# Altium PCB PCB1.PcbDoc
Units mm, origin at the board's own origin, x right, y up, seen from the top; angles counter-clockwise.
Board outline 93.5 x 93.5 mm, 2 copper layers (Top Layer, Bottom Layer); 120 components, 82 nets, 421 pads, 34 vias.
Unrouted connection lines stored in the file: 248.
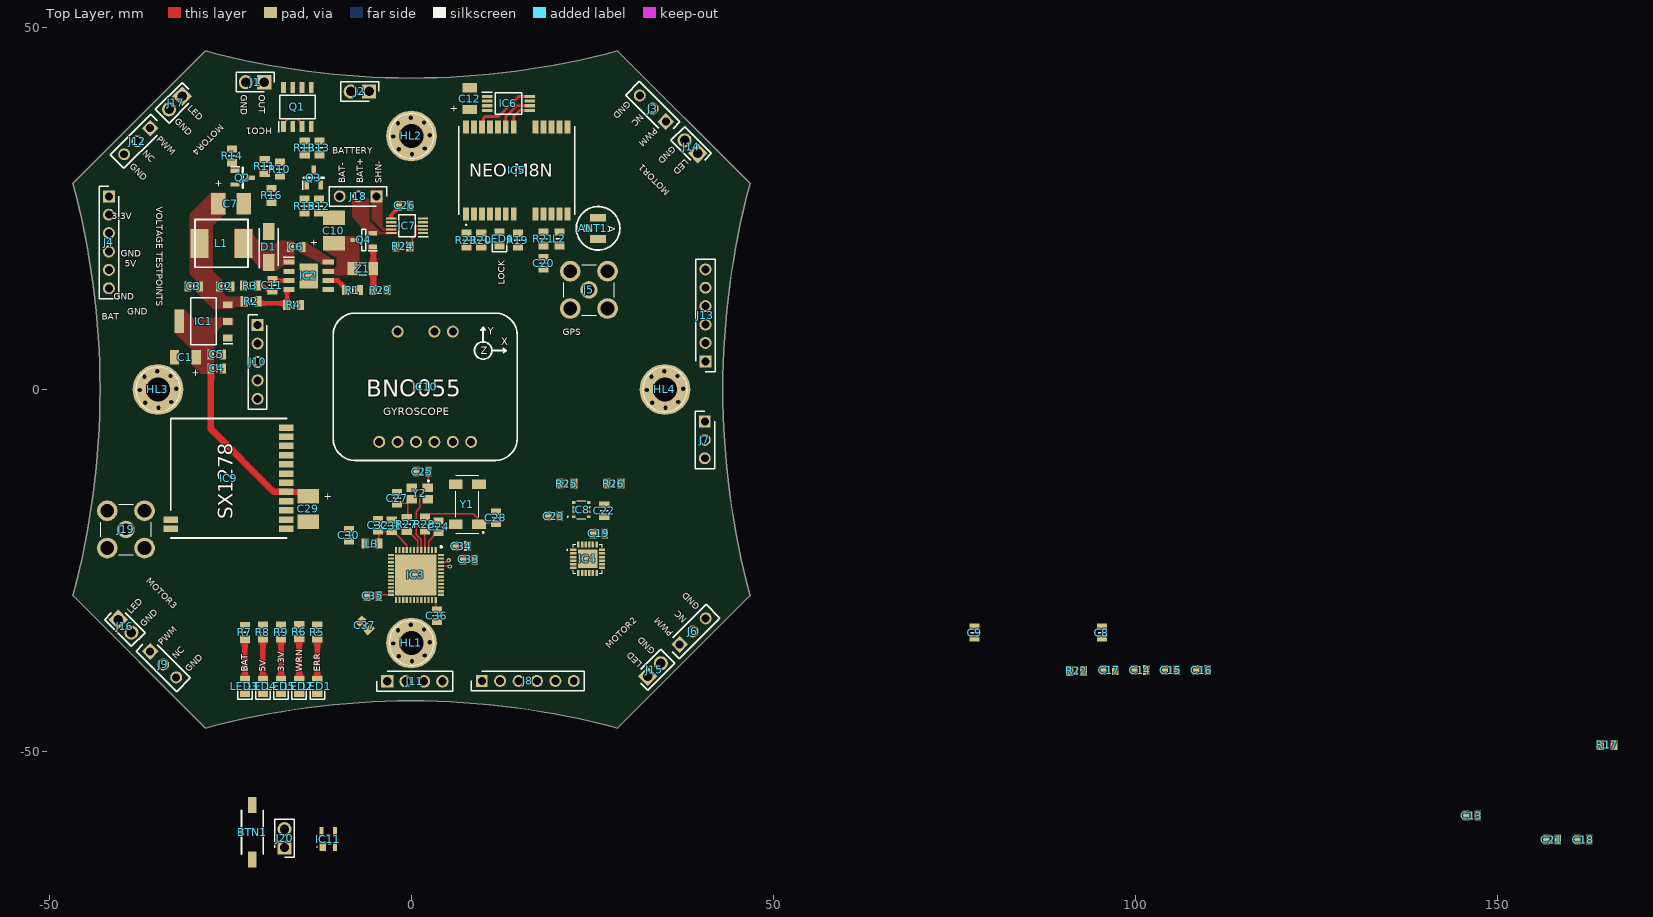
[diagram p0: Top Layer view]
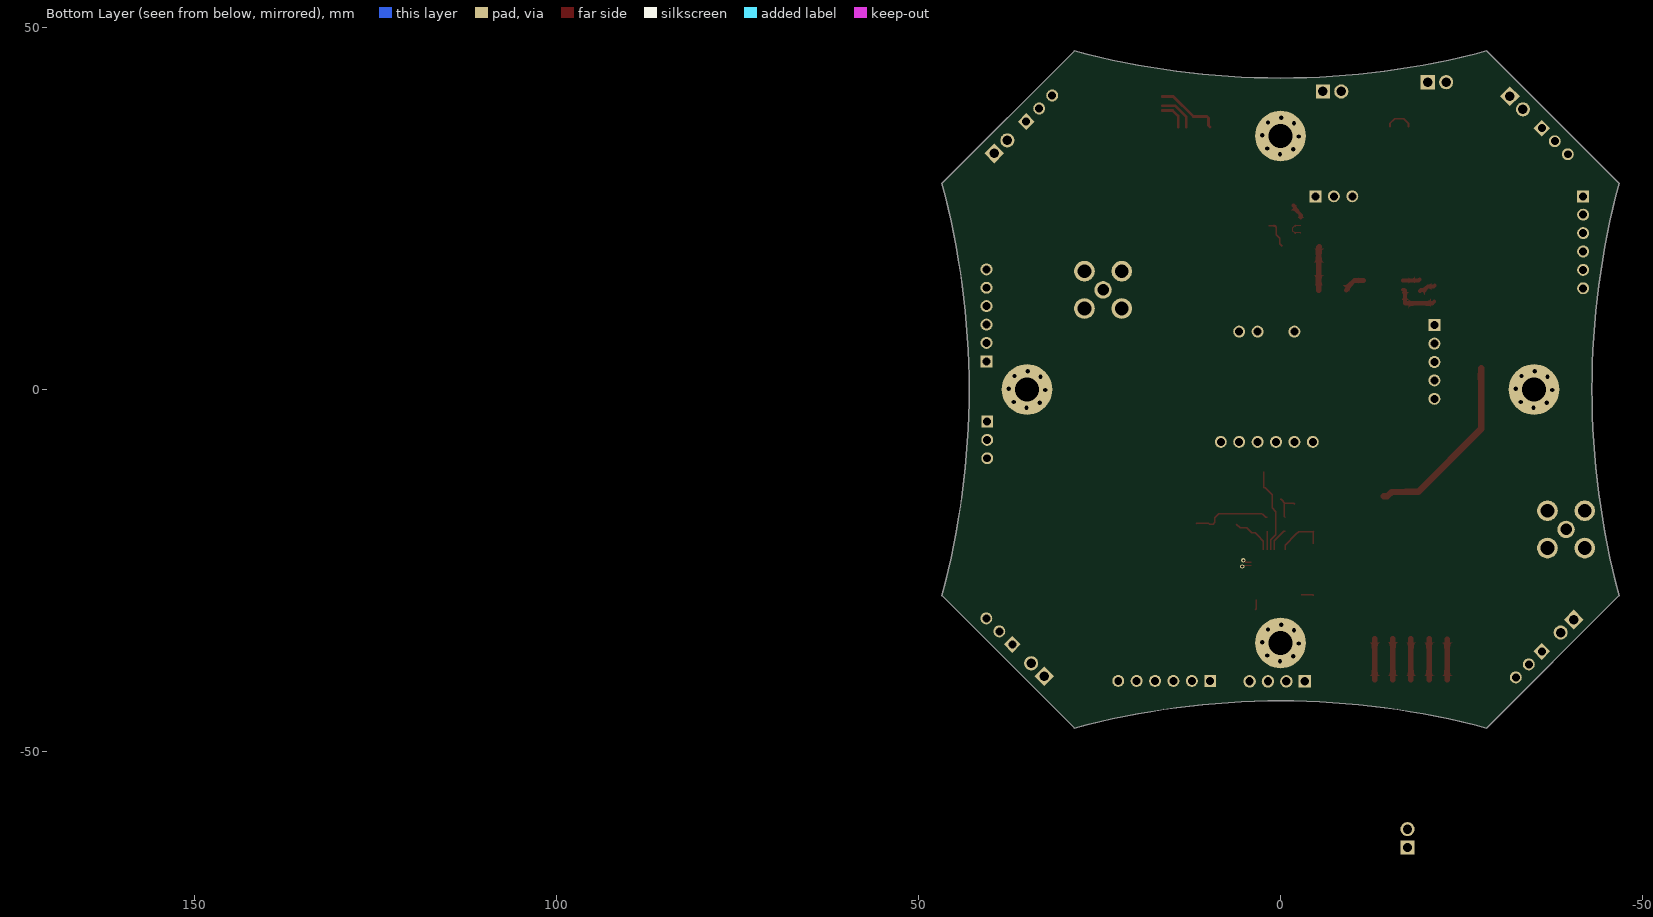
[diagram p1: Bottom Layer view, seen from below]

## Layer stack, top to bottom
Top Solder: solder mask 0.0102, Solder Resist, Dk 3.5
Top Layer: signal copper 0.0356
Dielectric 1: dielectric 0.32, FR-4, Dk 4.8
Bottom Layer: signal copper 0.0356
Bottom Solder: solder mask 0.0102, Solder Resist, Dk 3.5

## Board outline
-46.748,-28.47 ccw(c-153,0) -46.748,28.47 -28.47,46.748 ccw(c0,153) 28.47,46.748 46.748,28.47 ccw(c153,0) 46.748,-28.47 28.47,-46.748 ccw(c0,-153) -28.47,-46.748

## Design rules (kind name [scope] priority, off if disabled: settings)
BoardOutlineClearance [All] p1: gap=0.2 ignorepadtopadclearanceinfootprint=FALSE except(0.4: Arc-SplitBarrior Arc-SplitContinuation Track-SplitBarrior Track-SplitContinuation SMDPad-SplitBarrior SMDPad-SplitContinuation THPad-SplitBarrior THPad-SplitContinuation Via-SplitBarrior Via-SplitContinuation Fill-SplitBarrior Fill-SplitContinuation Poly-SplitBarrior Poly-SplitContinuation Region-SplitBarrior Region-SplitContinuation Text-SplitBarrior Text-SplitContinuation)
Clearance "Clearance Bottom Layer" [OnLayer('Bottom Layer')] p1: gap=0.203 ignorepadtopadclearanceinfootprint=TRUE except(0.253: Arc-Fill Arc-Poly Arc-Region Track-Fill Track-Poly Track-Region; 0.254: Arc-Text Track-Text SMDPad-Text THPad-Text Via-Text Fill-Text Poly-Text Region-Text Text-Text)
Clearance "Clearance Top Layer" [OnLayer('Top Layer')] p2: gap=0.203 ignorepadtopadclearanceinfootprint=TRUE except(0.253: Arc-Fill Arc-Poly Arc-Region Track-Fill Track-Poly Track-Region; 0.254: Arc-Text Track-Text SMDPad-Text THPad-Text Via-Text Fill-Text Poly-Text Region-Text Text-Text)
Clearance [All] p3: gap=0.2 ignorepadtopadclearanceinfootprint=TRUE except(0.089: Arc-SMDPad Track-SMDPad; 0.127: Arc-Arc Arc-Track Track-Track SMDPad-SMDPad SMDPad-Via THPad-Via; 0.254: Arc-Via Arc-Text Track-Via Track-Text SMDPad-Text THPad-Text Via-Via Via-Text Fill-Text Poly-Text Region-Text Text-Text; 0.5: THPad-THPad)
Height [All] p1: minheight=0 maxheight=100 prefheight=12.7
HoleSize ViaSize [IsVia] p1: absolutevalues=TRUE maxlimit=2.54 minlimit=0.3 maxpercent=80.000 minpercent=20.000
HoleSize [All] p2: absolutevalues=TRUE maxlimit=6.3 minlimit=0.2 maxpercent=80.000 minpercent=20.000
MinimumAnnularRing [All] p1: minimumring=0.13
MinimumSolderMaskSliver [All] p1: minsoldermaskwidth=0.1
PolygonConnect PolygonConnect_1 [All] p1: connectstyle=Direct reliefconductorwidth=0.508 reliefentries=4 polygonreliefangle="90 Angle" airgapwidth=0.254
RoutingCorners [All] p1: cornerstyle=Round minsetback=2.54 maxsetback=2.54
RoutingVias [All] p1: holewidth=0.5 width=1 viastyle="Through Hole" minholewidth=0.3 minwidth=0.6 maxholewidth=1 maxwidth=2
SilkToSilkClearance [All] p1: silktosilkclearance=0.1
SilkToSolderMaskClearance [IsPad] p1: minsilkscreentomaskgap=0.1 clearancetoexposedcopper=TRUE
SolderMaskExpansion [All] p1: expansion=0.102 istentingtop=FALSE
Width [All] p1: maxlimit=2.54 minlimit=0.127 preferedwidth=0.381
24 further rules are at their usual default settings.

## Classes and differential pairs
component class Schematic: BTN1 C1 C2 C3 C4 C5 C6 C7 C8 C9 C10 C11 C12 C13 C14 C15 C16 C17 C18 C19 C20 C21 C22 C23 C24 C25 C26 C27 C28 C29 C30 C31 C32 C33 C34 C35 C36 C37 D1 HL1 HL2 HL3 HL4 IC1 IC2 IC3 IC4 IC5 IC6 IC7 IC8 IC9 IC10 IC11 J1 J2 J3 J4 J8 J13 J16 J19 J20 L1 L2 L3 LED1 LED2 LED3 LED4 LED5 LED6 Q1 Q2 Q3 Q4 R1 R2 R3 R4 R5 R6 R7 R8 R9 R10 R11 R12 R13 R14 R15 R16 R17 R18 R19 R20 R21 R22 R23 R24 R25 R26 R27 R28 R29 Y1 Y2 Z1

## Components (designator, comment, footprint, x,y, rotation, side; value= is the part's Value field where it differs from the comment)
ANT1 "U.FL / IPX" "U.FL IPX Connector" 25.775,22.25 r270 top
BTN1 "BTN" SMD-Button-3*6mm -21.971,-64.135 r90 top
C1 "T A 47u" Tantal-A-1206 -29.718,4.445 r270 top
C2 "10n" "CAPC2012 METRIC" -25.712,14.224 r0 top
C3 "10u" "CAPC2012 METRIC" -30.03,14.224 r180 top
C4 "10n" "CAPC2012 METRIC" -26.866,2.921 r0 top
C5 "100n" "CAPC2012 METRIC" -26.866,4.826 r0 top
C6 "100n" "CAPC2012 METRIC" -15.882,19.678 r180 top
C7 "T B 47u" Tantal-B-1210 -26.67,25.654 r90 top
C8 "10u" "CAPC2012 METRIC" 95.344,-33.561 r90 top
C9 "10u" "CAPC2012 METRIC" 77.744,-33.561 r90 top
C10 "T B 47u" Tantal-B-1210 -10.702,20.178 r180 top
C11 "150p" "CAPC2012 METRIC" -19.202,14.358 r270 top
C12 "T A 47u" Tantal-A-1206 8.038,38.653 r180 top
C13 "100n" "CAPC2012 METRIC" 146.43,-58.849 r0 top
C14 "10u" "CAPC2012 METRIC" 100.644,-38.761 r0 top
C15 "100n" "CAPC2012 METRIC" 104.844,-38.761 r0 top
C16 "10n" "CAPC2012 METRIC" 109.144,-38.761 r0 top
C17 "100n" "CAPC2012 METRIC" 96.344,-38.761 r0 top
C18 "100n" "CAPC2012 METRIC" 161.797,-62.151 r0 top
C19 "2.2nF" "CAPC2012 METRIC" 25.882,-19.888 r0 top
C20 "10n" "CAPC2012 METRIC" 18.25,17.43 r270 top
C21 "2.2u" "CAPC2012 METRIC" 157.479,-62.151 r0 top
C22 "100n" "CAPC2012 METRIC" 26.621,-16.756 r90 top
C23 "100n" "CAPC2012 METRIC" 19.68,-17.5 r180 top
C24 "20p" "CAPC2012 METRIC" 3.747,-18.982 r90 top
C25 "20p" "CAPC2012 METRIC" 1.508,-11.349 r180 top
C26 "100n" "CAPC2012 METRIC" -0.958,25.4 r180 top
C27 "20p" "CAPC2012 METRIC" -1.982,-15.048 r270 top
C28 "20p" "CAPC2012 METRIC" 11.65,-17.731 r270 top
C29 "B" Tantal-B-1210 -14.25,-14.75 r0 top
C30 "10nF" "CAPC2012 METRIC" -8.636,-20.124 r90 top
C31 "10n" "CAPC2012 METRIC" -2.719,-18.844 r270 top
C32 "1u" "CAPC2012 METRIC" -4.605,-18.754 r270 top
C33 "100n" "CAPC2012 METRIC" 7.932,-23.454 r180 top
C34 "100n" "CAPC2012 METRIC" 6.902,-21.64 r180 top
C35 "100n" "CAPC2012 METRIC" -5.32,-28.5 r0 top
C36 "100n" "CAPC2012 METRIC" 3.5,-31.25 r90 top
C37 "10u" "CAPC2012 METRIC" -6.42,-32.58 r135 top
D1 "1N5824" DIOM5226X240N -19.702,19.678 r90 top
HL1 "M3" "DRILL HOLE M3" 0,-35 r0 top locked
HL2 "M3" "DRILL HOLE M3" 0,35 r0 top locked
HL3 "M3" "DRILL HOLE M3" -35,0 r0 top locked
HL4 "M3" "DRILL HOLE M3" 35,0 r0 top locked
IC1 "AMS1117-3.3" SOT229P700X180-4N -28.702,9.398 r180 top
IC2 "MP1584EN-LF" SOIC127P600X170-9N -14.202,15.678 r0 top
IC3 "STM32F401CCU6" QFN50P700X700X60-49N-D 0.607,-25.607 r270 top
IC4 "MPU-6050" MPU6050 24.312,-23.388 r0 top
IC5 "NEO-M8N" NEO-M8T 14.534,30.24 r270 top
IC6 "M24C32-RDW6TP" SOP65P640X120-8N 13.389,39.486 r0 top
IC7 "INA226AIDGST" SOP50P490X110-10N -0.594,22.59 r180 top
IC8 "BME280" MODBME280 23.446,-16.586 r180 top
IC9 "SX1278" SX1278 -25.25,-12.25 r180 top
IC10 "Adafruit BNO055" "Adfruit BNO055" 1.9,0.37 r0 top
IC11 "MAX811TEUS+" MAX811REUST -11.486,-62.087 r0 top
J1 "HCO1" HDRV2W110P0X254_1X2_508X254X854P -20.32,42.418 r180 top
J2 "HCO2" HDRV2W110P0X254_1X2_508X254X854P -5.842,41.148 r180 top
J3 "M1" HDRV3W64P0X254_1X3_762X254X869P 35.12,36.994 r135 top
J4 "Voltages" HDRV6W64P0X254_1X6_1524X254X869P -41.783,26.67 r270 top
J5 "SMA" PCBRPSMAFRAHT 24.5,13.75 r0 top
J6 "M2" HDRV3W64P0X254_1X3_762X254X869P 37.038,-35.203 r45 top
J7 "I2C" HDRV3W64P0X254_1X3_762X254X869P 40.5,-4.42 r270 top
J8 "UART" HDRV6W64P0X254_1X6_1524X254X869P 9.71,-40.25 r0 top
J9 "M3" HDRV3W64P0X254_1X3_762X254X869P -36.071,-36.171 r315 top
J10 "SPI" HDRV5W64P0X254_1X5_1270X254X854P -21.25,8.87 r270 top
J11 "Prog" HDRV4W95P0X254_1X4_1016X254X854P -3.34,-40.3 r0 top
J12 "M4" HDRV3W64P0X254_1X3_762X254X869P -36.068,36.068 r225 top
J13 "TOF Sensor" HDRV6W64P0X254_1X6_1524X254X869P 40.6,3.88 r90 top
J14 "exLED1" HDRV2W110P0X254_1X2_508X254X854P 39.52,32.594 r135 top
J15 "exLED2" HDRV2W110P0X254_1X2_508X254X854P 32.637,-39.604 r45 top
J16 "exLED3" HDRV2W110P0X254_1X2_508X254X854P -40.471,-31.77 r315 top
J17 "exLED4" HDRV2W110P0X254_1X2_508X254X854P -31.668,40.468 r225 top
J18 "BAT IN" HDRV3W64P0X254_1X3_762X254X869P -4.826,26.67 r180 top
J19 "SMA Ant" PCBRPSMAFRAHT -39.425,-19.325 r0 top
J20 "RST JMP" HDRV2W110P0X254_1X2_508X254X854P -17.526,-63.246 r90 top
L1 "15uH" "0630 Inductor" -26.227,20.178 r180 top
L2 "27n" RESC2012X65N 20.419,20.802 r90 top
L3 "39n" RESC2012X65N -5.465,-21.281 r180 top
LED1 "S1" "0805 LED" -13,-41 r270 top
LED2 "S2" "0805 LED" -15.5,-41 r270 top
LED3 "BAT" "0805 LED" -23,-41 r270 top
LED4 "5V" "0805 LED" -20.5,-41 r270 top
LED5 "3V3" "0805 LED" -18,-41 r270 top
LED6 "PLS" "0805 LED" 12.172,20.804 r270 top
Q1 "APM4953" SOIC127P600X175-8N -15.75,39 r90 top
Q2 "BC846BLT1G" SOT96P237X111-3N -23.3,29.25 r0 top
Q3 "BC846BLT1G" SOT96P237X111-3N -13.5,29.25 r90 top
Q4 "AO3401A" SOT95P280X125-3N -6.584,20.64 r180 top
R1 "100k" RESC2012X65N -8.128,13.716 r0 top
R2 "210k" RESC2012X65N -22.152,12.178 r0 top
R3 "100k" RESC2012X65N -22.225,14.351 r180 top
R4 "40k" RESC2012X65N -16.252,11.678 r0 top
R5 "TBT" RESC2012X65N -13,-33.5 r270 top
R6 "TBT" RESC2012X65N -15.5,-33.45 r270 top
R7 "TBT" RESC2012X65N -23,-33.55 r270 top
R8 "TBT" RESC2012X65N -20.5,-33.5 r270 top
R9 "TBT" RESC2012X65N -18,-33.5 r270 top
R10 "10k" RESC2012X65N -18.161,30.414 r270 top
R11 "1k" RESC2012X65N -20.25,30.8 r270 top
R12 "10k" RESC2012X65N -12.75,25.3 r90 top
R13 "1k" RESC2012X65N -12.7,33.34 r90 top
R14 "10k" RESC2012X65N -24.765,32.258 r270 top
R15 "10k" RESC2012X65N -14.75,25.3 r90 top
R16 "100k" RESC2012X65N -19.304,26.797 r90 top
R17 "10k" RESC2012X65N 165.099,-49.07 r0 top
R18 "100k" RESC2012X65N -14.732,33.34 r90 top
R19 "10k" RESC2012X65N 14.712,20.616 r270 top
R20 "1k" RESC2012X65N 9.632,20.616 r270 top
R21 "10" RESC2012X65N 18.25,20.8 r90 top
R22 "10k" RESC2012X65N 91.844,-38.861 r0 top
R23 "DNP" RESC2012X65N 7.6,20.616 r270 top
R24 "4.7k" RESC2012X65N -1.2,19.75 r0 top
R25 "4.7k" RESC2012X65N 21.45,-13 r180 top
R26 "4.7k" RESC2012X65N 27.95,-13 r0 top
R27 "39" RESC2012X65N -0.653,-18.624 r270 top
R28 "39" RESC2012X65N 1.861,-18.605 r270 top
R29 "100k" RESC2012X65N -4.318,13.716 r0 top
Y1 "MC-306 32.7680KHz" MC306327680KA3ROHS 7.716,-15.839 r90 top
Y2 "3225 25MHz" TSX3225240000MF20GAC0 1.143,-14.366 r180 top
Z1 "BZT52C47 10V" BZT52C47 -6.702,16.678 r0 top

## Footprints (in the part's own frame and the unit in brackets; to place one, negate y for a bottom-side part, rotate by r counter-clockwise, add the part's x,y. Pads: shape width x height; smd on the part's side, far side on the other; paste and mask are expansions set on the pad)
"0630 Inductor" [mm]
  rect 2.5x4 smd: 1(-3.025,0) 2(3.025,0)
  silkscreen extent -3.65,-3.3 3.65,3.3
"0805 LED" [mm]
  rect 1x1.4 smd: 1(-0.95,0) 2(0.95,0)
  silkscreen extent 0.4,-1 1.78,1
"Adfruit BNO055" [mm]
  round 1.65 hole 1.1: 1(-3.81,7.62) 3(1.27,7.62) 4(3.81,7.62) 5(-6.35,-7.62) 6(-3.81,-7.62) 7(-1.27,-7.62) 8(1.27,-7.62) 9(3.81,-7.62) 10(6.35,-7.62)
  silkscreen extent -12.7,-10.16 12.7,10.16
BZT52C47 [mm]
  rect 1.34x1.8 smd: 1(-1.43,0) 2(1.43,0)
  silkscreen extent -0.5,-0.85 0.5,0.85
"CAPC2012 METRIC" [mm]
  rect 0.91x1.39 smd: 1(-0.82,0) 2(0.82,0)
  silkscreen extent 0,-0.53 0,0.53, body extent -1,-0.63 1,0.63, height 0.95
DIOM5226X240N [mm]
  rect 2.35x1.55 smd: 1(-2.15,0) 2(2.15,0)
  silkscreen extent -2.92,-1.3 2.6,1.3, body extent -2.6,-1.3 2.6,1.3, height 2.4
"DRILL HOLE M3" [mm]
  round 7 hole 3.3 mask+0: 1(0,0)
  silkscreen extent -3.08,-3.08 3.07,3.08
HDRV2W110P0X254_1X2_508X254X854P [mm]
  rect 1.95x1.95 hole 1.3: 1(0,0)
  round 1.95 hole 1.3: 2(2.54,0)
  silkscreen extent -1.35,-1.35 3.89,1.35, body extent -1.27,-1.27 3.81,1.27, height 8.54
HDRV3W64P0X254_1X3_762X254X869P [mm]
  rect 1.65x1.65 hole 1.1: 1(0,0)
  round 1.65 hole 1.1: 2(2.54,0) 3(5.08,0)
  silkscreen extent -1.42,-1.35 6.5,1.35, body extent -1.27,-1.27 6.35,1.27, height 8.69
HDRV4W95P0X254_1X4_1016X254X854P [mm]
  rect 1.725x1.725 hole 1.15: 1(0,0)
  round 1.725 hole 1.15: 2(2.54,0) 3(5.08,0) 4(7.62,0)
  silkscreen extent -1.42,-1.37 9.04,1.37, body extent -1.27,-1.27 8.89,1.27, height 8.54
HDRV5W64P0X254_1X5_1270X254X854P [mm]
  rect 1.65x1.65 hole 1.1: 1(0,0)
  round 1.65 hole 1.1: 2(2.54,0) 3(5.08,0) 4(7.62,0) 5(10.16,0)
  silkscreen extent -1.42,-1.27 11.58,1.27, body extent -1.27,-1.27 11.43,1.27, height 8.54
HDRV6W64P0X254_1X6_1524X254X869P [mm]
  rect 1.65x1.65 hole 1.1: 1(0,0)
  round 1.65 hole 1.1: 2(2.54,0) 3(5.08,0) 4(7.62,0) 5(10.16,0) 6(12.7,0)
  silkscreen extent -1.42,-1.35 14.12,1.35, body extent -1.27,-1.27 13.97,1.27, height 8.69
MAX811REUST [mm]
  rect 0.94x1.31 smd: 1(-0.765,-1)
  rect 0.55x1.31 smd: 2(0.96,-1) 3(0.96,1) 4(-0.96,1)
  silkscreen extent -1.6,-1.15 0.4,0.65
MC306327680KA3ROHS [mm]
  rect 1.3x1.9 smd: 1(-2.75,-1.6) 2(2.75,-1.6) 3(2.75,1.6) 4(-2.75,1.6)
  silkscreen extent -4,-2.3 4,1.6, body extent -4,-2.42 4,2.42, height 2.64
MODBME280 [mm]
  rect 0.5x0.35 smd: 1(1.025,0.975) 2(1.025,0.325) 3(1.025,-0.325) 4(1.025,-0.975) 5(-1.025,-0.975) 6(-1.025,-0.325) 7(-1.025,0.325) 8(-1.025,0.975)
  silkscreen extent -0.6,-1.25 1.9,1.25, body extent -1.25,-1.25 1.25,1.25, height 1.1
MPU6050 [mm]
  rect 0.85x0.35 smd: 1(-1.975,1.25) 2(-1.975,0.75) 3(-1.975,0.25) 4(-1.975,-0.25) 5(-1.975,-0.75) 6(-1.975,-1.25) 13(1.975,-1.25) 14(1.975,-0.75) 15(1.975,-0.25) 16(1.975,0.25) 17(1.975,0.75) 18(1.975,1.25)
  rect 0.35x0.85 smd: 7(-1.25,-1.975) 8(-0.75,-1.975) 9(-0.25,-1.975) 10(0.25,-1.975) 11(0.75,-1.975) 12(1.25,-1.975) 19(1.25,1.975) 20(0.75,1.975) 21(0.25,1.975) 22(-0.25,1.975) 23(-0.75,1.975) 24(-1.25,1.975)
  rect 2.7x2.6 smd: 25(0,0)
  silkscreen extent -2.85,-2 2,2, body extent -2,-2 2,2, height 3.1
NEO-M8T [mm]
  rect 1.8x0.8 smd: 1(6,-7) 2(6,-5.9) 3(6,-4.8) 4(6,-3.7) 5(6,-2.6) 6(6,-1.5) 7(6,-0.4) 8(6,2.6) 9(6,3.7) 10(6,4.8) 11(6,5.9) 12(6,7) 13(-6,7) 14(-6,5.9) 15(-6,4.8) 16(-6,3.7) 17(-6,2.6) 18(-6,-0.4) 19(-6,-1.5) 20(-6,-2.6) 21(-6,-3.7) 22(-6,-4.8) 23(-6,-5.9) 24(-6,-7)
  silkscreen extent -6.1,-8 7.58,8
PCBRPSMAFRAHT [mm]
  round 2.4 hole 1.6: 1(0,0)
  round 2.85 hole 1.9: 2(-2.575,2.575) 3(-2.575,-2.575) 4(2.575,-2.575) 5(2.575,2.575)
  silkscreen extent -3.5,-3.5 3.5,3.5
QFN50P700X700X60-49N-D [mm]
  rect 0.85x0.3 smd: 1(-3.45,2.75) 2(-3.45,2.25) 3(-3.45,1.75) 4(-3.45,1.25) 5(-3.45,0.75) 6(-3.45,0.25) 7(-3.45,-0.25) 8(-3.45,-0.75) 9(-3.45,-1.25) 10(-3.45,-1.75) 11(-3.45,-2.25) 12(-3.45,-2.75) 25(3.45,-2.75) 26(3.45,-2.25) 27(3.45,-1.75) 28(3.45,-1.25) 29(3.45,-0.75) 30(3.45,-0.25) 31(3.45,0.25) 32(3.45,0.75) 33(3.45,1.25) 34(3.45,1.75) 35(3.45,2.25) 36(3.45,2.75)
  rect 0.3x0.85 smd: 13(-2.75,-3.45) 14(-2.25,-3.45) 15(-1.75,-3.45) 16(-1.25,-3.45) 17(-0.75,-3.45) 18(-0.25,-3.45) 19(0.25,-3.45) 20(0.75,-3.45) 21(1.25,-3.45) 22(1.75,-3.45) 23(2.25,-3.45) 24(2.75,-3.45) 37(2.75,3.45) 38(2.25,3.45) 39(1.75,3.45) 40(1.25,3.45) 41(0.75,3.45) 42(0.25,3.45) 43(-0.25,3.45) 44(-0.75,3.45) 45(-1.25,3.45) 46(-1.75,3.45) 47(-2.25,3.45) 48(-2.75,3.45)
  rect 5.7x5.7 smd: 49(0,0)
  silkscreen extent -4,3.38 -3.75,3.63, body extent -3.55,-3.55 3.55,3.55, height 0.6
RESC2012X65N [mm]
  rect 1x1.4 smd: 1(-0.95,0) 2(0.95,0)
  silkscreen extent 0,-0.53 0,0.53, body extent -1,-0.63 1,0.63, height 0.65
SMD-Button-3*6mm [mm]
  rect 2.2x1.2 smd: 1(-0.75,0) 2(6.75,0)
  silkscreen extent 0,-1.5 6,1.5
SOIC127P600X170-9N [mm]
  rect 1.525x0.7 smd: 1(-2.712,1.905) 2(-2.712,0.635) 3(-2.712,-0.635) 4(-2.712,-1.905) 5(2.712,-1.905) 6(2.712,-0.635) 7(2.712,0.635) 8(2.712,1.905)
  rect 2.56x3.45 smd: 9(0,0)
  silkscreen extent -3.47,2.61 -1.95,2.61, body extent -3,-2.45 3,2.45, height 1.7
SOIC127P600X175-8N [mm]
  rect 1.525x0.65 smd: 1(-2.712,1.905) 2(-2.712,0.635) 3(-2.712,-0.635) 4(-2.712,-1.905) 5(2.712,-1.905) 6(2.712,-0.635) 7(2.712,0.635) 8(2.712,1.905)
  silkscreen extent -3.47,-2.45 1.6,2.58, body extent -3,-2.45 3,2.45, height 1.75
SOP50P490X110-10N [mm]
  rect 1.4x0.3 smd: 1(-2.2,1) 2(-2.2,0.5) 3(-2.2,0) 4(-2.2,-0.5) 5(-2.2,-1) 6(2.2,-1) 7(2.2,-0.5) 8(2.2,0) 9(2.2,0.5) 10(2.2,1)
  silkscreen extent -2.9,-1.5 1.15,1.5, body extent -2.45,-1.5 2.45,1.5, height 1.1
SOP65P640X120-8N [mm]
  rect 1.475x0.45 smd: 1(-2.938,0.975) 2(-2.938,0.325) 3(-2.938,-0.325) 4(-2.938,-0.975) 5(2.938,-0.975) 6(2.938,-0.325) 7(2.938,0.325) 8(2.938,0.975)
  silkscreen extent -3.67,-1.5 1.85,1.55, body extent -3.2,-1.5 3.2,1.5, height 1.2
SOT95P280X125-3N [mm]
  rect 1.2x0.6 smd: 1(-1.25,0.95) 2(-1.25,-0.95) 3(1.25,0)
  silkscreen extent -1.85,-1.48 0.3,1.5, body extent -1.4,-1.47 1.4,1.48, height 1.25
SOT96P237X111-3N [mm]
  rect 1.25x0.6 smd: 1(-1.05,0.955) 2(-1.05,-0.955) 3(1.05,0)
  silkscreen extent -1.68,-1.46 0.08,1.51, body extent -1.18,-1.46 1.18,1.46, height 1.11
SOT229P700X180-4N [mm]
  rect 1.3x0.95 smd: 1(-3.35,2.29) 2(-3.35,0) 3(-3.35,-2.29)
  rect 1.3x3.25 smd: 4(3.35,0)
  silkscreen extent -4,-3.25 1.75,3.25, body extent -3.5,-3.25 3.5,3.25, height 1.8
SX1278 [mm]
  rect 2x0.9 smd paste+0: 1(-7.988,6.985) 2(-7.988,5.715) 3(-7.988,4.445) 4(-7.988,3.175) 5(-7.988,1.905) 6(-7.988,0.635) 7(-7.988,-0.635) 8(-7.988,-1.905) 9(-7.988,-3.175) 10(-7.988,-4.445) 11(-7.988,-5.715) 12(-7.988,-6.985) 13(7.988,6.985) 14(7.988,5.715)
  silkscreen extent -7.99,-8.27 7.99,8.26
Tantal-A-1206 [mm]
  rect 2x1.3 / inner rect 1.524x1.524 / far side rect 0x0 all layers, no hole mask+0.102: 1(0,0) 2(0,-3)
Tantal-B-1210 [mm]
  rect 3x2 / inner rect 1.524x1.524 / far side rect 0x0 all layers, no hole mask+0.102: 1(0,0) 2(0,-3.5)
TSX3225240000MF20GAC0 [mm]
  rect 1.4x1.15 smd: 1(-1.1,-0.8) 2(1.1,-0.8) 3(1.1,0.8) 4(-1.1,0.8)
  silkscreen extent -1.25,-1.8 -1.15,-1.7, body extent -1.69,-1.26 1.69,1.26, height 0.7
"U.FL IPX Connector" [mm]
  rect 1x1.05 smd: 1(0,-1.525)
  rect 1.05x2.2 smd: 2(-1.475,0) 2(1.475,0)
  silkscreen extent -3,-3 3,3

## Part data
ANT1: library part "U.FL SMD Antenna Connector", "Connector"
BTN1: library part SMDButton-3*6mm, "Button"
C1 C12: library part TANTAL-A, "Capacitor Tantalum"
C2 C3 C4 C5 C6 C8 C9 C11 C13 C14 C15 C16 C17 C18 C19 C20 C21 C22 C23 C24 C25 C26 C27 C28 C31 C32 C33 C34 C35 C36 C37: library part "Cap 0805 IMP", "Capacitor", Arrow Part Number=CL21B104KACNNNC, Manufacturer_Name="Samsung Electro-Mechanics", Mouser Part Number=N/A, Arrow Price/Stock=https://www.arrow.com/en/products/cl21b104kacnnnc/samsung-electro-mechanics, Datasheet Link=http://www.samsungsem.com/kr/support/product-search/mlcc/__icsFiles/afieldfile/2016/08/18/S_CL21B104KACNNNC.pdf, Height=0.95mm, Manufacturer_Part_Number=CL21B104KACNNNC, Mouser Price/Stock=https://www.mouser.co.uk/ProductDetail/Samsung-Electro-Mechanics/CL21B104KACNNNC?qs=yOVawPpwOwnhB47kNbieFw%3D%3D
C7 C10 C29: library part TANTAL-B, "Capacitor Tantalum"
C30: library part CL21B104KACNNNC, "Capacitor", Manufacturer_Name="Samsung Electro-Mechanics", Mouser Part Number=N/A, Arrow Part Number=CL21B104KACNNNC, Arrow Price/Stock=https://www.arrow.com/en/products/cl21b104kacnnnc/samsung-electro-mechanics, Datasheet Link=http://www.samsungsem.com/kr/support/product-search/mlcc/__icsFiles/afieldfile/2016/08/18/S_CL21B104KACNNNC.pdf, Height=0.95mm, Manufacturer_Part_Number=CL21B104KACNNNC, Mouser Price/Stock=https://www.mouser.co.uk/ProductDetail/Samsung-Electro-Mechanics/CL21B104KACNNNC?qs=yOVawPpwOwnhB47kNbieFw%3D%3D
D1: library part B160-13-F, "Diode", Manufacturer_Name="Diodes Inc.", Mouser Part Number=621-B160-F, Arrow Part Number=B160-13-F, Arrow Price/Stock=https://www.arrow.com/en/products/b160-13-f/diodes-incorporated, Datasheet Link=http://uk.rs-online.com/web/p/products/7384765, Height=2.4mm, Manufacturer_Part_Number=B160-13-F, Mouser Price/Stock=https://www.mouser.co.uk/ProductDetail/Diodes-Incorporated/B160-13-F/?qs=SQxTiZ%252BdFLDKHRPMwjkKCg%3D%3D
HL1 HL2 HL3 HL4: library part "M3 Mouting Hole", "Mounting Hole"
IC1: "Integrated Circuit", Manufacturer_Name="Advanced Monolithic Systems", Datasheet Link=http://www.advanced-monolithic.com/pdf/ds1117.pdf, Height=1.8mm, Manufacturer_Part_Number=AMS1117-3.3
IC2: "Integrated Circuit", Manufacturer_Name="Monolithic Power Systems (MPS)", Mouser Part Number=946-MP1584ENLF, Datasheet Link=https://componentsearchengine.com/Datasheets/1/MP1584EN-LF.pdf, Height=1.7mm, Manufacturer_Part_Number=MP1584EN-LF, Mouser Price/Stock=https://www.mouser.com/Search/Refine.aspx?Keyword=946-MP1584ENLF
IC3: "Integrated Circuit", Manufacturer_Name=STMicroelectronics, Mouser Part Number=511-STM32F401CCU6, Arrow Part Number=STM32F401CCU6, Arrow Price/Stock=https://www.arrow.com/en/products/stm32f401ccu6/stmicroelectronics?region=nac, Datasheet Link=http://www.st.com/web/en/resource/technical/document/datasheet/DM00086815.pdf, Height=0.6mm, Manufacturer_Part_Number=STM32F401CCU6, Mouser Price/Stock=https://www.mouser.co.uk/ProductDetail/STMicroelectronics/STM32F401CCU6?qs=DqCdCwOw4%2F5VrOZQxO795A%3D%3D
IC4: "Integrated Circuit", Manufacturer_Name=TDK, Mouser Part Number=410-MPU-6050, Arrow Part Number=MPU-6050, Arrow Price/Stock=https://www.arrow.com/en/products/mpu-6050/invensense, Datasheet Link=https://www.invensense.com/products/motion-tracking/6-axis/mpu-6050/, Height=3mm, Manufacturer_Part_Number=MPU-6050, Mouser Price/Stock=https://www.mouser.co.uk/ProductDetail/TDK-InvenSense/MPU-6050/?qs=u4fy%2FsgLU9O14B5JgyQFvg%3D%3D
IC5: "Integrated Circuit", Manufacturer_Name=U-Blox, Manufacturer_Part_Number=NEO-M8N-0-10, Datasheet Link=https://www.u-blox.com/sites/default/files/NEO-M8-FW3_DataSheet_%28UBX-15031086%29.pdf
IC6: "Integrated Circuit", Manufacturer_Name=STMicroelectronics, Mouser Part Number=511-M24C32-RDW6TP, Arrow Part Number=M24C32-RDW6TP, Arrow Price/Stock=https://www.arrow.com/en/products/m24c32-rdw6tp/stmicroelectronics, Datasheet Link=http://www.st.com/content/ccc/resource/technical/document/datasheet/80/4e/8c/54/f2/63/4c/4a/CD00001012.pdf/files/CD00001012.pdf/jcr:content/translations/en.CD00001012.pdf, Height=1.2mm, Manufacturer_Part_Number=M24C32-RDW6TP, Mouser Price/Stock=https://www.mouser.co.uk/ProductDetail/STMicroelectronics/M24C32-RDW6TP/?qs=%252B9pWl1iD4MVhMVBjnj8NEA%3D%3D
IC7: "Integrated Circuit", Manufacturer_Name="Texas Instruments", Mouser Part Number=595-INA226AIDGST, Arrow Part Number=INA226AIDGST, Arrow Price/Stock=https://www.arrow.com/en/products/ina226aidgst/texas-instruments, Datasheet Link=http://www.ti.com/lit/gpn/ina226, Height=1.1mm, Manufacturer_Part_Number=INA226AIDGST, Mouser Price/Stock=https://www.mouser.co.uk/ProductDetail/Texas-Instruments/INA226AIDGST?qs=tQG3bEuiOZB3Ay2BJOjnEQ%3D%3D
IC8: library part MOD-BME280, "Integrated Circuit", Manufacturer_Name="Olimex Ltd.", Mouser Part Number=909-MOD-BME280, Datasheet Link=https://eu.mouser.com/datasheet/2/306/BME280-1620794.pdf, Height=1mm, Manufacturer_Part_Number=MOD-BME280, Mouser Price/Stock=https://www.mouser.co.uk/ProductDetail/Olimex-Ltd/MOD-BME280/?qs=%252B6g0mu59x7K82sEO3yPPgg%3D%3D
IC9: "RF"
IC11: "Integrated Circuit", Manufacturer_Name="Maxim Integrated", Datasheet Link=https://pdfserv.maximintegrated.com/en/ds/MAX811-MAX812.pdf, Manufacturer_Part_Number=MAX811TEUS+
J1 J2 J14 J15 J16 J17 J20: library part 61300211121, "Connector", Manufacturer_Name="Wurth Elektronik", Mouser Part Number=710-61300211121, Datasheet Link=https://componentsearchengine.com/Datasheets/2/61300211121.pdf, Height=8.54mm, Manufacturer_Part_Number=61300211121, Mouser Price/Stock=https://www.mouser.co.uk/ProductDetail/Wurth-Elektronik/61300211121/?qs=t4813l51qx%252B1A5GYDQxPlw%3D%3D
J3 J6 J7 J9 J12 J18: library part 61300311121, "Connector", Manufacturer_Name="Wurth Elektronik", Mouser Part Number=710-61300311121, Datasheet Link=http://katalog.we-online.de/em/datasheet/6130xx11121.pdf, Height=8.69mm, Manufacturer_Part_Number=61300311121, Mouser Price/Stock=https://www.mouser.co.uk/ProductDetail/Wurth-Elektronik/61300311121/?qs=PhR8RmCirEYxRWFJzNKsUw%3D%3D
J4 J8 J13: library part 61300611121, "Connector", Manufacturer_Name="Wurth Elektronik", Mouser Part Number=710-61300611121, Datasheet Link=https://componentsearchengine.com/Datasheets/2/61300611121.pdf, Height=8.69mm, Manufacturer_Part_Number=61300611121, Mouser Price/Stock=https://www.mouser.co.uk/ProductDetail/Wurth-Elektronik/61300611121?qs=t4813l51qx%2FRpdf0Kp1HlQ%3D%3D
J5 J19: library part "SMA Antenna", "Connector", Manufacturer_Name=Taoglas, Manufacturer_Part_Number=PCB.RPSMAFRA.HT, Mouser Part Number=960-PCB.RPSMAFRA.HT, Datasheet Link=http://www.taoglas.com/wp-content/uploads/2016/01/PCB.RPSMAFRA.HT_.pdf, Height=7.4mm, Mouser Price/Stock=https://www.mouser.co.uk/ProductDetail/Taoglas/PCBRPSMAFRAHT/?qs=RuW%2Fu%252BNMQmvVc2WiXpnkVw%3D%3D
J10: library part 61300511121, "Connector", Manufacturer_Name="Wurth Elektronik", Mouser Part Number=710-61300511121, Datasheet Link=http://katalog.we-online.de/em/datasheet/6130xx11121.pdf, Height=8.54mm, Manufacturer_Part_Number=61300511121, Mouser Price/Stock=https://www.mouser.co.uk/ProductDetail/Wurth-Elektronik/61300511121/?qs=PhR8RmCirEZCsCRHq%252BvfRQ%3D%3D
J11: library part 61300411121, "Connector", Manufacturer_Name="Wurth Elektronik", Mouser Part Number=710-61300411121, Datasheet Link=http://katalog.we-online.de/em/datasheet/6130xx11121.pdf, Height=8.54mm, Manufacturer_Part_Number=61300411121, Mouser Price/Stock=https://www.mouser.co.uk/ProductDetail/Wurth-Elektronik/61300411121?qs=PhR8RmCirEYQcLLqXD8rAA%3D%3D
L1: library part "0630 Inductor", "Inductor"
L2 L3: library part "0805 Inductor", "Inductor"
LED1 LED2 LED3 LED4 LED5 LED6: library part "LED 0805", "LED"
Q1: "MOSFET (P-Channel)", Manufacturer_Name="Guangdong Hottech", Datasheet Link=https://datasheet.lcsc.com/szlcsc/Guangdong-Hottech-4953_C181099.pdf, Height=1.75mm, Manufacturer_Part_Number=APM4953
Q2 Q3: "Integrated Circuit", Manufacturer_Name="ON Semiconductor", Mouser Part Number=863-BC846BLT1G, Arrow Part Number=BC846BLT1G, Arrow Price/Stock=https://www.arrow.com/en/products/bc846blt1g/on-semiconductor, Datasheet Link=http://www.onsemi.com/pub/Collateral/BC846ALT1-D.PDF, Height=1.11mm, Manufacturer_Part_Number=BC846BLT1G, Mouser Price/Stock=https://www.mouser.co.uk/ProductDetail/onsemi/BC846BLT1G?qs=vNc2DXHODiJuwwGLruzsRg%3D%3D
Q4: "MOSFET (P-Channel)", Manufacturer_Name="Alpha & Omega Semiconductors", Arrow Part Number=AO3401A, Arrow Price/Stock=https://www.arrow.com/en/products/ao3401a/alpha-and-omega-semiconductor?region=nac, Datasheet Link=http://www.aosmd.com/pdfs/datasheet/AO3401A.pdf, Height=1.25mm, Manufacturer_Part_Number=AO3401A
R1 R2 R3 R4 R5 R6 R7 R8 R9 R10 R11 R12 R13 R14 R15 R16 R17 R18 R19 R20 R21 R22 R23 R24 R25 R26 R27 R28 R29: library part "Res 0805", "Resistor", Arrow Part Number=RMCF0805ZT0R00, Manufacturer_Name="Stackpole Electronics Inc.", Arrow Price/Stock=https://www.arrow.com/en/products/rmcf0805zt0r00/stackpole-electronics, Datasheet Link=https://www.seielect.com/Catalog/SEI-RMCF_RMCP.pdf, Height=0.65mm, Manufacturer_Part_Number=RMCF0805ZT0R00
Y1: library part MC-306_32.7680K-A3_ROHS, "Crystal or Oscillator", Manufacturer_Name="Epson Timing", Manufacturer_Part_Number="MC-306 32.7680K-A3:ROHS", Mouser Part Number=732-MC306-32.7KA3R, Datasheet Link="https://componentsearchengine.com/Datasheets/1/MC-306 32.7680K-A3_ROHS.pdf", Height=2.54mm, Mouser Price/Stock=https://www.mouser.co.uk/ProductDetail/Epson-Timing/MC-306-327680K-A3ROHS/?qs=CU9taR8hkvbxBMNmXnQ1pw%3D%3D
Y2: library part "3225 Oscillator", "Crystal or Oscillator", Manufacturer_Name="Epson Timing", Manufacturer_Part_Number="TSX-3225 16.0000MF10U-B0", Mouser Part Number=732-322516MF10U-B0, Datasheet Link=https://support.epson.biz/td/api/doc_check.php?dl=brief_TSX-3225&lang=en, Height=0.6mm, Mouser Price/Stock=https://www.mouser.co.uk/ProductDetail/Epson-Timing/TSX-3225-160000MF10U-B0?qs=%252B0hcjpVv37o282i6EmdVvw%3D%3D
Z1: library part BZT52C47, "Diode Zener", Manufacturer_Name="Taiwan Semiconductor", Mouser Part Number=821-BZT52C47, Datasheet Link=https://www.mouser.com/datasheet/2/395/BZT52C2V4_SERIES_G1804-1393215.pdf, Height=1.15mm, Manufacturer_Part_Number=BZT52C47, Mouser Price/Stock=https://www.mouser.co.uk/ProductDetail/Taiwan-Semiconductor/BZT52C47?qs=tHU%2FlV7kTyS%252BAcVYuoc%2Fdw%3D%3D

## Via types
v1: diameter 1, hole 0.6, Top Layer to Bottom Layer, 32 vias
v2: diameter 0.6, hole 0.3, Top Layer to Bottom Layer, 2 vias

## Nets (pads, with @x,y where several pads share a name; then routed paths per layer and width w, separated by ;. In a path a pad name is that pad's centre, name@x,y a point inside that pad or via, vN(x,y) a via of type N, cw(c..) or ccw(c..) an arc to the next point about the centre after c; other vN are vias at no path point)
3V3: C1.1 C4.1 C5.1 C12.1 C13.2 C14.1 C15.1 C16.1 C18.2 C22.1 C23.1 C26.2 C29.1 C30.2 C33.2 C34.2 C35.2 C36.2 C37.2 IC1.2 IC1.4 IC3.1 IC3.24 IC3.36 IC3.48 IC4.8 IC4.13 IC5.22 IC5.23 IC6.8 IC7.6 IC8.2 IC8.6 IC8.8 IC9.5 IC10.5 IC11.4 J4.5 J13.1 L3.2 R9.1 R19.2 R25.2 R26.2 | length 40
  Top Layer w0.152: C26.2 C26.2@-1.743,25.435
  Top Layer w0.203: C35.2 -4.5,-28.357 IC3.24 ; IC3.36 3.357,-30.287 C36.2
  Top Layer w0.381: IC5.22 9.944,36.45 9.944,37.472 10.167,37.695 12.045,37.695 14.811,40.461 IC6.8
  Top Layer w0.508: IC7.6@-2.794,23.701 -2.794,24.134 -1.979,24.949 -1.979,25.199 C26.2
  Top Layer w0.889: C4.1 -27.686,-5.461 -18.998,-14.149 -17.267,-14.149 -17.256,-14.161 -15.339,-14.161 -14.75,-14.75 C29.1
3V3A: C31.2 C32.2 IC3.9 L3.1 | length 7
  Top Layer w0.203: C32.2 C32.2@-4.515,-19.664 ; L3.1 C32.2@-4.515,-19.664 ; IC3.9 -0.643,-21.506 -2.125,-20.024 -2.125,-20.018 -2.131,-20.018 -2.485,-19.664 C31.2 C32.2@-4.515,-19.664
5V: C2.1 C3.1 C7.1 C8.1 IC1.3 J4.3 L1.2 R2.1 R8.1
BAT: C9.1 C10.1 IC2.7 J4.1 Q1.1 Q1.3 Q4.3 R7.1 R10.1 R12.1 Z1.1 | length 4
  Top Layer w0.254: Q1.1 -17.655,36.725 -17,37.381 -15.77,37.381 -15.115,36.725 Q1.3
BNORST: IC3.25 IC10.10
GND: ANT1.2 BTN1.2 C1.2 C2.2 C3.2 C4.2 C5.2 C7.2 C8.2 C9.2 C10.2 C12.2 C13.1 C14.2 C15.2 C16.2 C17.2 C18.1 C19.2 C20.2 C21.1 C22.2 C23.2 C24.2 C25.2 C26.1 C27.1 C28.1 C29.2 C30.1 C31.1 C32.1 C33.1 C34.1 C35.1 C36.1 C37.1 D1.2 HL1.1 HL2.1 HL3.1 HL4.1 IC1.1 IC2.5 IC2.9 IC3.8 IC3.23 IC3.35 IC3.47 IC3.49 IC4.1 IC4.11 IC4.18 IC4.25 IC5.10 IC5.12 IC5.13 IC5.24 IC6.1 IC6.2 IC6.3 IC6.4 IC6.7 IC7.1 IC7.2 IC7.7 IC8.1 IC8.5 IC8.7 IC9.1 IC9.12 IC9.14 IC10.7 IC11.1 J1.2 J2.2 J3.3 J4.2 J4.4 J4.6 J5.2 J5.3 J5.4 J5.5 J6.3 J7.3 J8.3 J8.6 J9.3 J10.5 J11.1 J12.3 J13.3 J14.2 J15.2 J16.2 J17.2 J18.3 J19.2 J19.3 J19.4 J19.5 LED1.2 LED2.2 LED3.2 LED4.2 LED5.2 LED6.2 Q2.2 Q3.2 R1.2 R3.2 R4.2 R16.2 R17.2 R18.2 R22.1 R23.2 R24.1 R29.2 Y1.2 Y1.3 Y2.2 Y2.4
  other v1: 0.08,-37.534 -1.735,-36.848 1.848,-36.735 -2.534,-35.08 2.534,-34.92 -1.848,-33.265 1.735,-33.152 -0.08,-32.466 -34.92,-2.534 35.08,-2.534 -36.735,-1.848 33.265,-1.848 -33.152,-1.735 36.848,-1.735 -37.534,-0.08 32.466,-0.08 -32.466,0.08 37.534,0.08 -36.848,1.735 33.152,1.735 -33.265,1.848 36.735,1.848 -35.08,2.534 34.92,2.534 0.08,32.466 -1.735,33.152 1.848,33.265 -2.534,34.92 2.534,35.08 -1.848,36.735 1.735,36.848 -0.08,37.534
GPSANT: ANT1.1 IC5.11 J5.1 L2.2
GSCL: IC5.19 IC6.6 | length 5.3
  Top Layer w0.381: IC5.19 13.034,37.668 14.527,39.161 IC6.6
GSDA: IC5.18 IC6.5 | length 4
  Top Layer w0.381: IC5.18 14.134,37.752 14.893,38.511 IC6.5
HCO1: IC3.10 R14.1
HCO2: IC3.11 R15.1
I2CSCL: IC3.45 IC4.23 IC7.5 IC8.4 IC10.8 J7.2 J13.2 R26.1 | length 1.3
  Top Layer w0.152: IC3.45 5.207,-24.357 v2(5.292,-24.442)
I2CSDA: IC3.46 IC4.24 IC7.4 IC8.3 IC10.9 J7.1 J13.5 R25.1 | length 1.2
  Top Layer w0.203: IC3.46 4.813,-23.857 5.072,-23.598 v2(5.13,-23.598)
INAAlert: IC3.26 IC7.3 R24.2 | length 4.1
  Top Layer w0.203: R24.2 0.097,20.097 0.097,20.856 0.568,21.327 0.568,22.412 0.738,22.583 1.599,22.583 IC7.3
LED1: IC3.38 J14.1
LED2: IC3.33 J15.1
LED3: IC3.21 J16.1
LED4: IC3.2 J17.1
MISO: IC3.16 IC9.6 J10.2
MOSI: IC3.17 IC9.7 J10.3
NetBTN1_1: BTN1.1 J20.2
NetC6_1: C6.1 IC2.8
NetC6_2: C6.2 D1.1 IC2.1 L1.1
NetC11_1: C11.1 IC2.3 | length 2.3
  Top Layer w0.508: C11.1 -19.064,15.04 IC2.3@-16.917,15.04
NetC11_2: C11.2 R3.1 | length 2.4
  Top Layer w0.508: R3.1 -21.139,14.215 -20.311,14.215 -19.835,13.739 -19.403,13.739 C11.2
NetC17_1: C17.1 IC4.10
NetC19_1: C19.1 IC4.20
NetC20_1: C20.1 L2.1 R21.1
NetC21_2: C21.2 IC3.22
NetC27_2: C27.2 R27.1 Y2.3 | length 4.3
  Top Layer w0.203: C27.2 -1.797,-15.683 -0.599,-15.683 -0.464,-15.548 -0.285,-15.368 -0.082,-15.166 Y2.3 ; R27.1 -0.537,-17.558 -0.537,-15.746
NetC28_2: C28.2 R28.1 Y1.1 | length 11.7
  Top Layer w0.203: R28.1 2.061,-17.655 2.46,-17.256 2.46,-17.251 2.579,-17.132 8.546,-17.132 9.098,-17.684 9.098,-18.371 Y1.1 ; C28.2 11.596,-18.497 Y1.1@9.911,-18.497 ; Y1.1 Y1.1@9.819,-18.589 ; Y1.1 Y1.1@9.819,-18.589 ; Y1.1@9.819,-18.589 Y1.1@9.911,-18.497 ; Y1.1@9.819,-18.589 Y1.1@9.911,-18.497
NetIC2_4: IC2.4 R2.2 R4.1 | length 6.3
  Top Layer w0.508: R2.2 -21.202,12.124 R2.2@-20.956,11.878 ; R4.1@-17.188,11.892 -17.188,13.677 -17.092,13.773 IC2.4
  Top Layer w0.635: R2.2@-20.956,11.878 R4.1@-17.202,11.878
NetIC2_6: IC2.6 R1.1 | length 3.1
  Top Layer w0.635: IC2.6 -10.192,15.043 -9.261,14.112 -9.261,13.899 R1.1
NetIC3_44: IC3.44 R17.1
NetIC4_9: IC4.9 R22.2
NetIC5_2: IC5.2 R23.1
NetIC5_3: IC5.3 R20.1
NetIC5_8: IC5.8 R19.1
NetIC5_9: IC5.9 R21.2
NetIC9_13: IC9.13 J19.1
NetIC11_3: IC11.3 J20.1
NetJ1_1: J1.1 Q1.7 Q1.8
NetJ2_1: J2.1 Q1.5 Q1.6
NetLED1_1: LED1.1 R5.2 | length 5.6
  Top Layer w0.762: LED1.1 R5.2
NetLED2_1: LED2.1 R6.2 | length 5.6
  Top Layer w0.762: LED2.1 R6.2
NetLED3_1: LED3.1 R7.2 | length 5.6
  Top Layer w0.762: LED3.1 R7.2
NetLED4_1: LED4.1 R8.2 | length 5.6
  Top Layer w0.762: LED4.1 R8.2
NetLED5_1: LED5.1 R9.2 | length 5.6
  Top Layer w0.762: LED5.1 R9.2
NetLED6_1: LED6.1 R20.2
NetQ1_2: Q1.2 R11.2
NetQ1_4: Q1.4 R13.2
NetQ2_1: Q2.1 R14.2 R16.1
NetQ2_3: Q2.3 R10.2 R11.1
NetQ3_1: Q3.1 R15.2 R18.1
NetQ3_3: Q3.3 R12.2 R13.1
NetQ4_1: Q4.1 R29.1 Z1.2 | length 6
  Top Layer w0.762: Q4.1 -5.272,19.628 Z1.2 ; R29.1 Z1.2@-5.268,16.674
NRST: IC3.7 IC11.2
OSC32I: C24.1 IC3.3 Y1.4 | length 6.2
  Top Layer w0.203: IC3.3 2.357,-20.958 3.154,-20.161 3.154,-20.155 3.16,-20.155 3.513,-19.802 C24.1 ; Y1.4 5.58,-19.125 4.657,-19.125 4.341,-19.442 4.341,-19.448 4.334,-19.448 C24.1@3.981,-19.802 ; C24.1 C24.1@3.981,-19.802 ; C24.1 C24.1@3.981,-19.802
OSC32O: IC3.4 R28.2 | length 2.6
  Top Layer w0.203: IC3.4 1.861,-22.153 R28.2
OSCHI: C25.1 IC3.5 Y2.1 | length 11.9
  Top Layer w0.203: IC3.5 1.357,-20.758 0.64,-20.041 0.64,-16.863 1.136,-16.366 1.136,-14.553 1.644,-14.045 1.644,-14.039 2.118,-13.566 Y2.1 2.328,-13.48 C25.1
OSCHO: IC3.6 R27.2 | length 3.3
  Top Layer w0.203: R27.2 -0.453,-19.574 0.857,-20.885 IC3.6
PWM1: IC3.29 J3.1
PWM2: IC3.30 J6.1
PWM3: IC3.31 J9.1
PWM4: IC3.32 J12.1
RX1: IC3.43 IC5.20 J8.2
RX2: IC3.13 J8.5
SCLK: IC3.15 IC9.8 J10.4
SH+: IC7.8 IC7.10 J18.2 Q4.2 | length 2.9
  Top Layer w0.152: IC7.10 -2.775,21.609 -1.955,21.609 -1.712,21.851 -1.712,22.354 -1.955,22.596 -2.788,22.596 IC7.8
SH-: IC7.9 J18.1
STAT1: IC3.28 R5.1
STAT2: IC3.27 R6.1
SWCLK: IC3.37 J11.3
SWIO: IC3.34 J11.2
SWO: IC3.39 J11.4
SXDIO0: IC3.19 IC9.10
SXRST: IC3.20 IC9.11
SXSS: IC3.18 IC9.9 J10.1
TOFINT: IC3.41 J13.4
TOFSHUT: IC3.40 J13.6
TX1: IC3.42 IC5.21 J8.1
TX2: IC3.12 J8.4
pads on no net: IC2.2 IC3.14 IC4.2 IC4.3 IC4.4 IC4.5 IC4.6 IC4.7 IC4.12 IC4.14 IC4.15 IC4.16 IC4.17 IC4.19 IC4.21 IC4.22 IC5.1 IC5.4 IC5.5 IC5.6 IC5.7 IC5.14 IC5.15 IC5.16 IC5.17 IC9.2 IC9.3 IC9.4 IC10.1 IC10.3 IC10.4 IC10.6 J3.2 J6.2 J9.2 J12.2

## Polygon pours and split planes (outlines as drawn)
3V3 on Top Layer "NONET_L01_P-001" (solid, pour order 7): -32.639,11.049 -31.369,11.049 -30.226,9.906 -24.638,9.906 -24.638,8.89 -26.035,8.89 -27.215,7.71 -27.215,2.157 -29.081,2.157 -30.353,3.429 -30.353,5.461 -32.639,7.747
5V on Top Layer "NONET_L01_P-001" (solid, pour order 6): -25.654,27.178 -25.654,24.13 -25.908,24.13 -27.432,22.606 -27.432,16.383 -26.035,14.986 -26.035,13.335 -25.527,12.827 -22.606,12.827 -22.606,11.43 -24.384,11.43 -24.638,11.176 -27.432,11.176 -29.718,13.462 -29.718,14.986 -30.607,15.875 -30.607,24.257 -27.686,27.178
SH+ on Top Layer "NONET_L01_P-001" (solid, pour order 0): -7.772,27.356 -8.179,26.857 -8.179,23.774 -5.918,21.285 -4.75,21.285 -4.505,21.438 -3.505,21.438 -2.032,21.438 -2.032,21.734 -4.208,21.734 -5.842,23.368 -5.842,26.156 -7.01,27.407
SH- on Top Layer "NONET_L01_P-001" (solid, pour order 4): -5.5,27.483 -4.013,27.483 -4.013,22.555 -3.683,22.225 -2.108,22.225 -2.108,21.946 -3.946,21.946 -5.5,23.5
NetC6_1 on Top Layer "NONET_L01_P-001" (solid, pour order 3): -10.744,17.932 -11.989,18.694 -14.63,20.371 -15.519,20.371 -15.519,18.974 -12.243,17.247 -10.744,17.247 -12.243,17.247 -10.744,17.247
NetC6_2 on Top Layer "NONET_L01_P-001" (solid, pour order 2): -16.154,17.221 -16.154,20.408 -16.152,20.41 -16.291,20.549 -18.11,20.549 -18.847,20.091 -20.803,20.091 -21.946,21.514 -21.946,22.174 -24.46,22.174 -24.435,22.149 -24.435,18.186 -22.276,18.186 -20.447,16.358 -18.517,16.358 -17.653,17.221
BAT on Top Layer "NONET_L01_P-001" (solid, pour order 1): -12.243,16.662 -12.243,15.977 -10.719,15.977 -10.541,15.799 -7.239,15.799 -7.239,17.805 -7.239,21.158 -12.192,21.158 -12.192,19.202 -12.167,19.177 -12.167,19.202 -10.338,18.186 -10.338,17.043 -10.719,16.662

## Silkscreen, mask and mechanical layers (free items; w line width, h text height)
Top Overlay:
  text "GND" at -23.94,40.706 h1.52 r270
  text "OUT" at -21.399,40.706 h1.52 r270
  text "GND" at 29.554,40.139 h1.52 r225
  text "LED" at -31.22,38.494 h1.52 r315
  text "NC" at 31.35,38.343 h1.52 r225
  text "MOTOR4" at -26.648,36.957 h1.52 r225
  text "GND" at -33.016,36.698 h1.52 r315
  text "HCO1" at -19.239,36.512 h1.52 r180
  text "PWM" at 33.236,36.457 h1.52 r225
  text "PWM" at -35.531,34.184 h1.52 r315
  text "GND" at 35.75,33.942 h1.52 r225
  text "NC" at -37.417,32.298 h1.52 r315
  text "BATTERY" at -10.939,32.194 h1.52
  text "LED" at 37.546,32.146 h1.52 r225
  text "GND" at -39.213,30.502 h1.52 r315
  text "BAT-" at -8.827,28.448 h1.52 r90
  text "BAT+" at -6.287,28.448 h1.52 r90
  text "SHN-" at -3.747,28.448 h1.52 r90
  text "MOTOR1" at 36.009,27.574 h1.52 r135
  text "VOLTAGE TESTPOINTS" at -35.578,25.248 h1.52 r270
  text "3.3V" at -41.375,23.177 h1.52
  text "GND" at -40.105,17.97 h1.52
  text "5V" at -39.597,16.573 h1.52
  text "LOCK" at 13.251,14.454 h1.52 r90
  text "GND" at -41.121,12.065 h1.52
  text "GND" at -39.216,9.97 h1.52
  text "BAT" at -42.772,9.271 h1.52
  text "GPS" at 20.899,7.17 h1.52
  text "MOTOR3" at -36.96,-26.75 h1.52 r315
  text "GND" at 40.182,-29.637 h1.52 r135
  text "LED" at -38.497,-31.323 h1.52 r45
  text "NC" at 38.386,-31.433 h1.52 r135
  text "GND" at -36.701,-33.119 h1.52 r45
  text "PWM" at 36.5,-33.319 h1.52 r135
  text "PWM" at -34.186,-35.633 h1.52 r45
  text "GND" at 33.986,-35.834 h1.52 r135
  text "MOTOR2" at 27.617,-36.092 h1.52 r45
  text "NC" at -32.3,-37.519 h1.52 r45
  text "LED" at 32.19,-37.63 h1.52 r135
  text "BAT" at -22.25,-39 h1.52 r90
  text "5V" at -19.75,-39 h1.52 r90
  text "3.3V" at -17.25,-39 h1.52 r90
  text "WRN" at -14.75,-39 h1.52 r90
  text "ERR" at -12.25,-39 h1.52 r90
  text "GND" at -30.504,-39.315 h1.52 r45
Board Shape:
  circle w0.5: c-35,0 r1.75
  circle w0.5: c0,-35 r1.75
  circle w0.5: c35,0 r1.75
  circle w0.5: c0,35 r1.75
  circle w0.5: c0,0 r2.787
  lines w0.5: -30.116,-45.102 -30.116,-45.102 ; -30.116,-45.102 -28.47,-46.748 ; -30.116,-45.102 -46.748,-28.47 ccw(c-153,0) -46.748,28.47 -28.47,46.748 ccw(c0,153) 28.47,46.748 46.748,28.47 ccw(c153,0) 46.748,-28.47 28.47,-46.748 ccw(c0,-153) -28.47,-46.748 ; -28.47,-46.748 -28.47,-46.748

## Text inside footprints (layer, text, board x,y; h text height)
ANT1: Top Overlay "A" at 27.075,22.583 h1 r270
C1: Top Overlay "+" at -30.218,2.878 h1 r270
C7: Top Overlay "+" at -26.17,27.821 h1 r90
C10: Top Overlay "+" at -12.869,20.678 h1 r180
C12: Top Overlay "+" at 6.471,39.153 h1 r180
C29: Top Overlay "+" at -12.083,-15.25 h1
IC10: Top Overlay "BNO055" at -6.223,-1.83 h4; Top Overlay "X" at 12.367,6.07 h1; Top Overlay "Y" at 10.567,7.57 h1; Top Overlay "Z" at 9.567,4.87 h1; Top Overlay "GYROSCOPE" at -3.899,-3.884 h1.8